# Altium PCB PCB2.PcbDoc
Units mm, origin at the board's own origin, x right, y up, seen from the top; angles counter-clockwise.
Board outline 58.67 x 100.33 mm, 2 copper layers (Top Layer, Bottom Layer); 70 components, 53 nets, 269 pads, 89 vias.
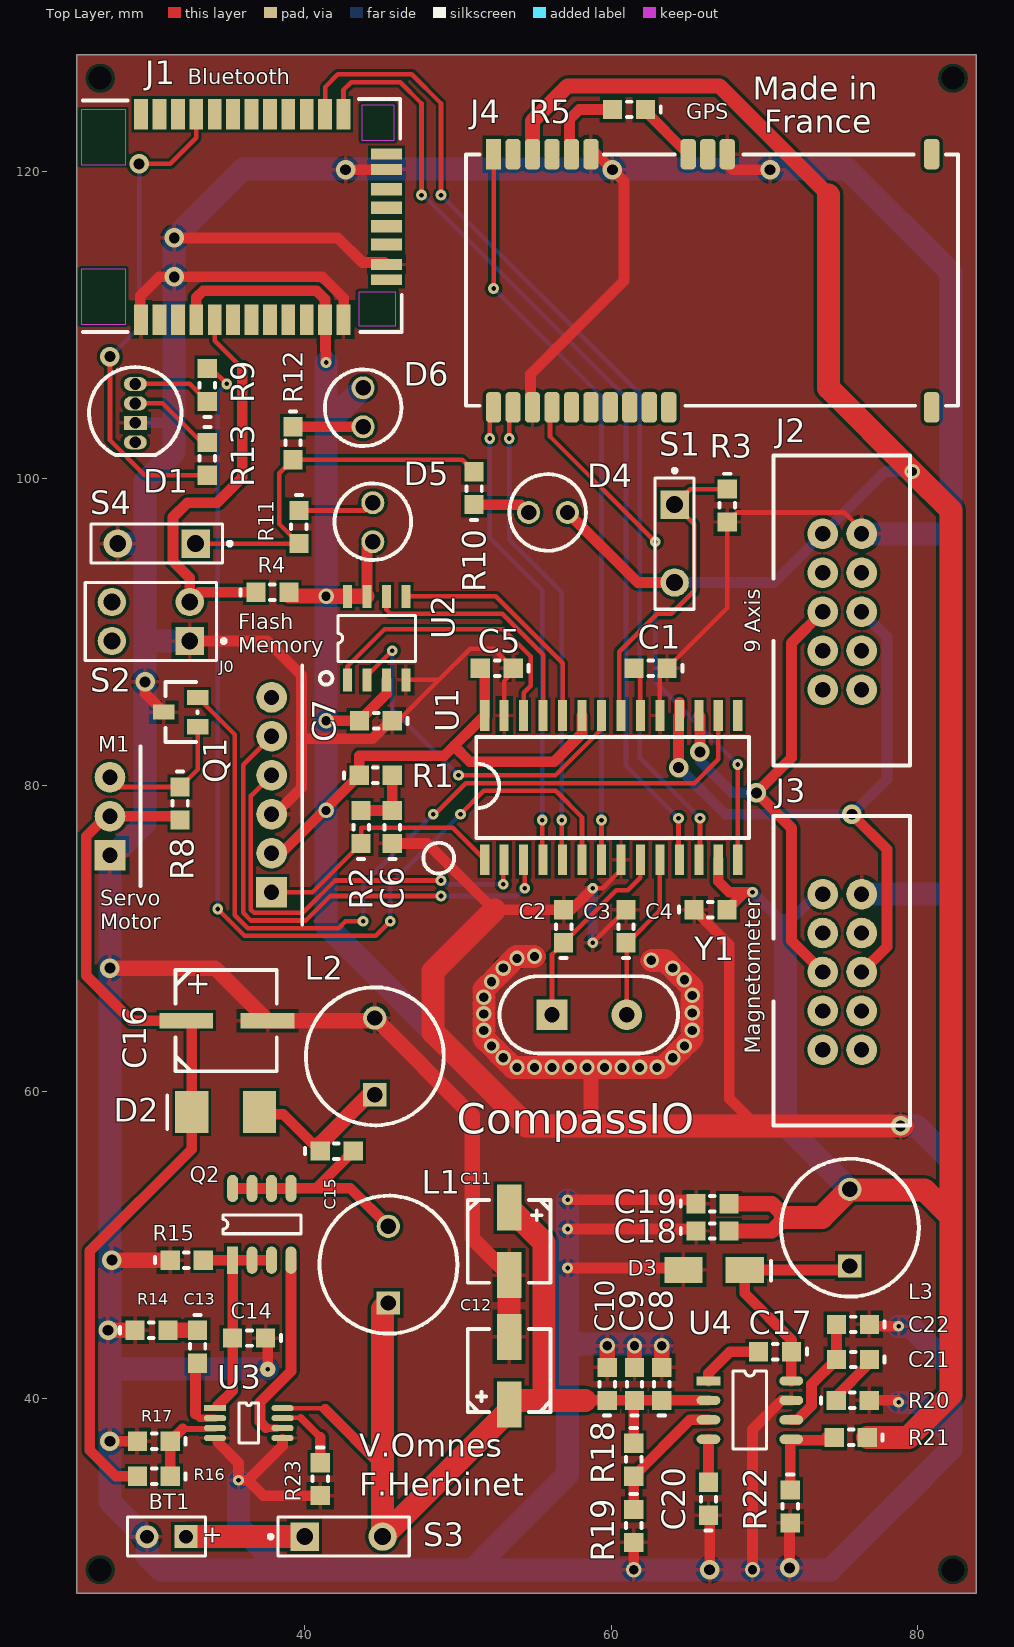
[diagram p0: Top Layer view]
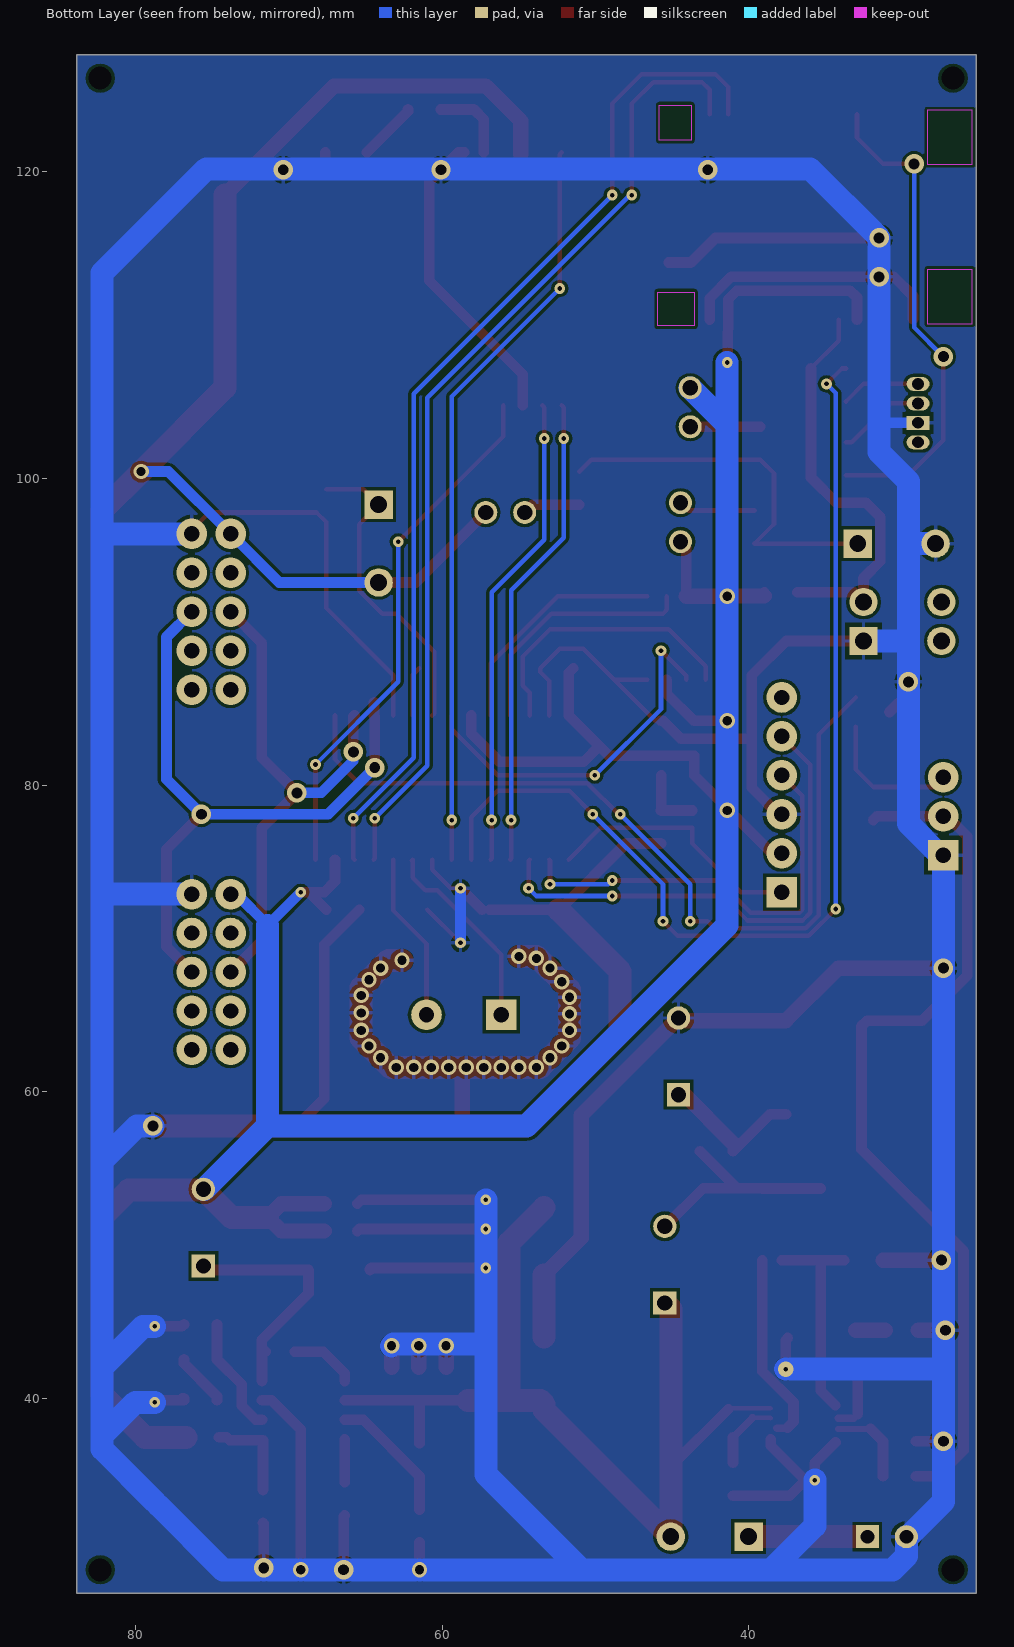
[diagram p1: Bottom Layer view, seen from below]

## Layer stack, top to bottom
Top Solder: solder mask 0.0102, Solder Resist, Dk 3.5
Top Layer: signal copper 0.0356
Dielectric 1: dielectric 0.32, FR-4, Dk 4.8
Bottom Layer: signal copper 0.0356
Bottom Solder: solder mask 0.0102, Solder Resist, Dk 3.5

## Board outline
25.146,27.305 83.82,27.305 83.82,127.635 25.146,127.635

## Design rules (kind name [scope] priority, off if disabled: settings)
Clearance [All] p1: gap=0.2
HoleSize [All] p1: absolutevalues=TRUE maxlimit=2.54 minlimit=0.3 maxpercent=80.000 minpercent=20.000
MinimumSolderMaskSliver [All] p1: minsoldermaskwidth=0
PolygonConnect [All] p1: connectstyle=Relief reliefconductorwidth=0.254 reliefentries=4 polygonreliefangle="90 Angle" airgapwidth=0.254
RoutingVias [All] p1: holewidth=0.711 width=1.27 viastyle="Through Hole" minholewidth=0.3 minwidth=0.2 maxholewidth=0.711 maxwidth=1.27
SilkToSilkClearance [All] p1: silktosilkclearance=0.1
SilkToSolderMaskClearance [IsPad] p1: minsilkscreentomaskgap=0.1 clearancetoexposedcopper=TRUE
SolderMaskExpansion [All] p1: expansion=0.102
UnpouredPolygon [All] p1: allowunpoured=FALSE
Width [All] p1: maxlimit=2 minlimit=0.2 preferedwidth=0.3
25 further rules are at their usual default settings.

## Classes and differential pairs
component class Accelerometer/Gyroscope/Magnetometer: J2 J3
component class Bluetooth: J1 R4 S2
component class Flash: C7 U2
component class GPS: J4 R5
component class "LED RGB": D1 D4 D5 D6 R9 R10 R11 R12 R13 S4
component class PIC32: C1 C2 C3 C4 C5 C6 J0 R1 R2 R3 S1 U1 Y1
component class POWER: BT1 C8 C9 C10 C11 C12 C13 C14 C15 C16 C17 C18 C19 C20 C21 C22 D2 D3 L2 Q2 R14 R15 R16 R17 R18 R19 R20 R21 R22 R23 S3 U3 U4
component class ServoMotor: M1 Q1 R8

## Components (designator, comment, footprint, x,y, rotation, side; value= is the part's Value field where it differs from the comment)
BT1 "6V" BAT-2 30.988,30.988 r180 top
C1 "10μF" own_0603 63.636,87.63 r180 top
C2 "15pF" own_0603 56.896,69.723 r90 top
C3 "15pF" own_0603 60.96,69.723 r90 top
C4 "0.1μF" own_0603 65.405,71.882 r0 top
C5 "0.1μF" own_0603 53.603,87.63 r180 top
C6 "0.1μF" own_0603 45.72,76.2 r90 top
C7 "100nF" own_0603 45.72,84.201 r180 top
C8 "4.7uF" own_0603 63.293,39.878 r90 top
C9 "4.7uF" own_0603 61.515,39.878 r90 top
C10 "0.01uF" own_0603 59.737,39.878 r90 top
C11 "Cin" WE-865080542005 53.34,52.451 r270 top
C12 "Cin" WE-865080542005 53.34,39.624 r90 top
C13 "0.1uF" own_0603 33.02,44.45 r270 top
C14 "1nF" own_0603 37.456,43.942 r180 top
C15 "1uF" own_0603 41.021,56.134 r0 top
C16 "Cout" SMT-HA-V-D 32.385,64.643 r90 top
C17 "0.1uF" own_0603 71.755,43.053 r180 top
C18 "47uF" own_0603 65.532,50.927 r0 top
C19 "47uF" own_0603 65.532,52.705 r0 top
C20 "0.015uF" own_0603 66.341,32.385 r90 top
C21 "1000pF" own_0603 76.835,42.545 r180 top
C22 "47pF" own_0603 76.835,44.831 r180 top
D1 "L-154A4SUREQBFZGEW" L-154A4SUREQBFZGEW 28.956,102.362 r180 top
D2 "MBRS130LT3" SMB-403A-03-J 32.639,58.674 r0 top
D3 "B240A" SMA-B2XX/A 68.707,48.387 r180 top
D4 "LED3" LED2.5 57.15,97.79 r180 top
D5 "LED3" LED2.5 44.45,95.885 r90 top
D6 "LED3" LED2.5 43.815,105.918 r270 top
J0 "Program / Debug" "C-Grid III X6" 37.846,73.025 r90 top
J1 "RN42" RN42 29.337,110.363 r90 top
J2 "MOD-MPU9150" "UEXT_MALE x10" 73.787,96.393 r0 top
J3 "MAG3110 Breakout" "UEXT_MALE x10" 73.787,72.898 r0 top
J4 "A2035-H" A2035-H 52.324,104.648 r90 top
L1 "10uH" "RLB Series" 45.466,46.228 r90 top
L2 "10uH" "RLB Series" 44.577,59.817 r90 top
L3 "10uH" "RLB Series" 75.565,48.641 r90 top
M1 "SG90" "C-Grid III x3" 27.305,75.438 r90 top
Q1 "MOSFET-2N7002" 2N7002 33.02,83.82 r90 top
Q2 "IRF7807" SO-8 35.306,49.022 r90 top
R1 "10k" own_0603 43.561,80.645 r0 top
R2 "1k" own_0603 43.688,76.2 r90 top
R3 "1k" own_0603 67.564,99.314 r270 top
R4 "10k" own_0603 36.83,92.583 r0 top
R5 "10K" own_0603 62.23,124.079 r180 top
R8 "5k" own_0603 31.877,79.883 r270 top
R9 "330" own_0603 33.655,105.029 r90 top
R10 "1K" own_0603 51.054,98.298 r90 top
R11 "1K" own_0603 39.624,97.917 r270 top
R12 "1K" own_0603 39.243,103.378 r270 top
R13 "330" own_0603 33.655,102.362 r270 top
R14 "4.7K" own_0603 28.947,44.45 r0 top
R15 "0.05" own_0603 31.242,49.022 r0 top
R16 "60K" own_0603 31.242,34.925 r180 top
R17 "20K" own_0603 31.242,37.211 r180 top
R18 "332K" own_0603 61.468,37.084 r270 top
R19 "68.1K" own_0603 61.468,32.766 r270 top
R20 "29.4K" own_0603 74.676,39.878 r0 top
R21 "10.2K" own_0603 76.699,37.465 r180 top
R22 "3.24K" own_0603 71.675,34.036 r270 top
R23 "40K" own_0603 41.021,35.814 r270 top
S1 "SW-PB" SPST-2 64.135,95.758 r270 top
S2 "Switch" DPST-4 29.972,90.678 r180 top
S3 "SW-SPST" SPST-2 42.545,30.988 r0 top
S4 "SW-SPST" SPST-2 30.353,95.758 r180 top
U1 "PIC32MX250F128B" PIC32MX250F128/SO 51.444,75.946 r0 top
U2 "LE25U40CMD" LE25U40CMDTWG 42.799,86.868 r90 top
U3 "LM3488" S-PDSO-G8 34.163,39.37 r0 top
U4 "TPS54231D" R-PDSO-G8 66.341,41.148 r0 top
Y1 "8MHz" 9B-8.000MAAJ-B 56.134,65.024 r0 top

## Footprints (in the part's own frame and the unit in brackets; to place one, negate y for a bottom-side part, rotate by r counter-clockwise, add the part's x,y. Pads: shape width x height; smd on the part's side, far side on the other; paste and mask are expansions set on the pad)
2N7002 [mm]
  rect 1x1.4 smd: 1(0,0) 2(1.9,0) 3(0.95,2.2)
  silkscreen extent -1,0 2.9,2.1
9B-8.000MAAJ-B [mm] "Quartz 8MHz"
  rect 2x2 hole 1: 1(0,0)
  round 2 hole 1: 2(4.88,0)
  silkscreen extent -3.41,-2.52 8.21,2.52
A2035-H [mm]
  rect 2x1 smd: 1(16.51,0)
  rrect50% 2x1 smd: 2(16.51,-1.27) 3(16.51,-2.54) 4(16.51,-3.81) 5(16.51,-5.08) 6(16.51,-6.35) 7(16.51,-12.7) 8(16.51,-13.97) 9(16.51,-15.24) 10(16.51,-28.575) 11(0,-28.575) 12(0,-11.43) 13(0,-10.16) 14(0,-8.89) 15(0,-7.62) 16(0,-6.35) 17(0,-5.08) 18(0,-3.81) 19(0,-2.54) 20(0,-1.27) 21(0,0)
  silkscreen extent 0.1,-30.3 16.5,1.8
BAT-2 [mm] "Battery; 2 Leads"
  rect 1.5x1.5 hole 0.9: 1(-1.27,0)
  round 1.5 hole 0.9: 2(1.27,0)
  silkscreen extent -2.54,-1.27 2.54,1.27
"C-Grid III x3" [mm]
  rect 2x2 hole 1: 1(0,0)
  round 2 hole 1: 2(2.54,0) 3(5.08,0)
  silkscreen extent -2,-2 7.1,-2
"C-Grid III X6" [mm]
  rect 2x2 hole 1: 1(0,0)
  round 2 hole 1: 2(2.54,0) 3(5.08,0) 4(7.62,0) 5(10.16,0) 6(12.7,0)
  silkscreen extent -2.1,-2 14.8,-2
DPST-4 [mm] "Switch; 4 Leads"
  rect 1.85x1.85 hole 1.1: 1(-2.54,1.27)
  round 1.85 hole 1.1: 2(-2.54,-1.27) 3(2.54,-1.27) 4(2.54,1.27)
  silkscreen extent -4.88,-2.54 4.28,2.54
L-154A4SUREQBFZGEW [mm] "LED RGB"
  oval 1.5x0.9 hole 0.762: 1(0,0) 3(0,-2.54) 4(0,-3.81)
  rect 1.5x0.9 hole 0.762: 2(0,-1.27)
  silkscreen extent -3.01,-4.91 3.01,0.82
LE25U40CMDTWG [mm]
  rect 1.5x0.6 smd: 1(0,0) 2(0,-1.27) 3(0,-2.54) 4(0,-3.81) 5(5.45,-3.81) 6(5.45,-2.54) 7(5.45,-1.27) 8(5.45,0)
  silkscreen extent -0.31,-4.44 4.2,1.81
LED2.5 [mm] "LED"
  round 1.5 hole 1: 1(0,0) 2(2.54,0)
  silkscreen extent -1.2,-2.5 3.8,2.5
own_0603 [mm] "0603_fp"
  rect 1.25x1.25 smd: 1(0,0) 2(2.15,0)
  silkscreen extent -1,-0.5 1.2,0.5
PIC32MX250F128/SO [mm]
  rect 0.6x2 smd: 1(0.3,-0.8) 2(1.57,-0.8) 3(2.84,-0.8) 4(4.11,-0.8) 5(5.38,-0.8) 6(6.65,-0.8) 7(7.92,-0.8) 8(9.19,-0.8) 9(10.46,-0.8) 10(11.73,-0.8) 11(13,-0.8) 12(14.27,-0.8) 13(15.54,-0.8) 14(16.81,-0.8) 15(16.81,8.6) 16(15.54,8.6) 17(14.27,8.6) 18(13,8.6) 19(11.73,8.6) 20(10.46,8.6) 21(9.19,8.6) 22(7.92,8.6) 23(6.65,8.6) 24(5.38,8.6) 25(4.11,8.6) 26(2.84,8.6) 27(1.57,8.6) 28(0.3,8.6)
  silkscreen extent -3.7,-1.7 17.55,7.2
R-PDSO-G8 [mm] "TPS54231"
  rect 1.55x0.6 smd: 1(0,0)
  oval 1.55x0.6 smd: 2(0,-1.27) 3(0,-2.54) 4(0,-3.81) 5(5.4,-3.81) 6(5.4,-2.54) 7(5.4,-1.27) 8(5.4,0)
  silkscreen extent 1.61,-4.44 3.79,0.64
"RLB Series" [mil]
  rect 60x60 hole 39.37: 1(0,0)
  round 60 hole 39.37: 2(196.85,0)
  silkscreen extent -79,-177 276,177
RN42 [mm]
  rect 2x0.9 smd: 1(0,0) 2(0,-1.2) 3(0,-2.4) 4(0,-3.6) 5(0,-4.8) 6(0,-6) 7(0,-7.2) 8(0,-8.4) 9(0,-9.6) 10(0,-10.8) 11(0,-12) 12(0,-13.2) 13(13.4,-13.2) 14(13.4,-12) 15(13.4,-10.8) 16(13.4,-9.6) 17(13.4,-8.4) 18(13.4,-7.2) 19(13.4,-6) 20(13.4,-4.8) 21(13.4,-3.6) 22(13.4,-2.4) 23(13.4,-1.2) 24(13.4,0)
  rect 0.7x2 smd: 28(9.8,-16) 29(3.6,-16) 30(10.8,-16) 35(2.6,-16)
  rect 0.8x2 smd: 31(8.5,-16) 32(7.3,-16) 33(6.1,-16) 34(4.9,-16)
  Keep-Out Layer region: 10.1,1 13.7,1 13.7,3.9 10.1,3.9
  Keep-Out Layer region: -0.3,1 3.3,1 3.3,3.9 -0.3,3.9
  Keep-Out Layer region: 11.7,-16.5 14,-16.5 14,-14.4 11.7,-14.4
  Keep-Out Layer region: -0.4,-16.6 1.8,-16.6 1.8,-14.2 -0.4,-14.2
  silkscreen extent -0.8,-17 14.4,3.8
S-PDSO-G8 [mm] "LM3488"
  rect 1.45x0.4 smd: 1(0,0)
  oval 1.45x0.4 smd: 2(0,-0.65) 3(0,-1.3) 4(0,-1.95) 5(4.4,-1.95) 6(4.4,-1.3) 7(4.4,-0.65) 8(4.4,0)
  silkscreen extent 1.56,-2.28 2.84,0.33
SMA-B2XX/A [mm] "B240A-13-F"
  rect 2.5x1.7 smd: 1(0,0) 2(4,0)
  silkscreen extent -1.7,-0.6 -1.7,0.7
SMB-403A-03-J [mil] "MBRS130LT3G"
  rect 85x107.99 smd: 1(0,0) 2(174.02,0)
  silkscreen extent -63,-43 -63,43
SMT-HA-V-D [mm] "EEEHA1A101WP"
  rect 1x3.5 smd: 1(0,0.1) 2(0,-5.2)
  silkscreen extent -3.3,-5.8 3.3,0.8
SO-8 [mm] "IRF7807"
  rect 1.78x0.72 smd: 1(0,0)
  oval 1.78x0.72 smd: 2(0,-1.27) 3(0,-2.54) 4(0,-3.81) 5(4.68,-3.81) 6(4.68,-2.54) 7(4.68,-1.27) 8(4.68,0)
  silkscreen extent 1.72,-4.44 2.96,0.64
SPST-2 [mm] "Switch; 2 Leads"
  rect 1.85x1.85 hole 1.1: 1(-2.54,0)
  round 1.85 hole 1.1: 2(2.54,0)
  silkscreen extent -4.89,-1.27 4.28,1.27
"UEXT_MALE x10" [mm]
  round 2 hole 1: 1(0,0) 2(2.54,0) 3(0,-2.54) 4(2.54,-2.54) 5(0,-5.08) 6(2.54,-5.08) 7(0,-7.62) 8(2.54,-7.62) 9(0,-10.16) 10(2.54,-10.16)
  silkscreen extent -3.2,-15.1 5.7,5.1
WE-865080542005 [mm]
  rect 3x1.6 smd: 1(0,0) 2(4.4,0)
  silkscreen extent -0.5,-2.7 4.9,2.7

## Part data
BT1: library part Battery, "4xAA"
C1 C2 C3 C4 C5 C6 C7 C8 C9 C10 C13 C14 C15 C17 C18 C19 C20 C21 C22: library part Cap, "Capacitor"
C11 C12 C16: library part "Cap Pol1", "Polarized Capacitor (Radial)"
D1: "LED RGB"
D2 D3: library part "Diode 10TQ035", "Schottky Rectifier"
D4 D5 D6: "Typical BLUE SiC LED"
J0: library part ICSP
J1: "Bluetooth Module"
J2: "9-Axis"
J3: library part MOD-MAG3110
J4: "GPS Module"
L1 L2 L3: library part Inductor, "Inductor"
M1: "Servo motor"
Q1: library part MOSFET-N, "N-Channel MOSFET"
Q2: "MOSFET-8"
R1 R2 R3 R4 R5 R8 R9 R10 R11 R12 R13 R14 R15 R16 R17 R18 R19 R20 R21 R22 R23: library part Res1, "Resistor"
S1: "Switch"
S2: library part SW-PB, "Reset"
S3 S4: "Single-Pole, Single-Throw Switch"
U1: "Microcontrolleur"
U2: "Flash memory"
U3: "SEPIC 5V"
U4: "Buck SD 3.3V"
Y1: library part XTAL, "Crystal Oscillator"

## Free pads (board coordinates)
  round 0 hole 1.5: ""(26.67,28.829) ""(26.67,126.111) ""(82.296,28.829) ""(82.296,126.111)

## Via types
v1: diameter 1, hole 0.6, Top Layer to Bottom Layer, 35 vias
v2: diameter 0.7, hole 0.3, Top Layer to Bottom Layer, 34 vias
v3: diameter 1.27, hole 0.711, Top Layer to Bottom Layer, 19 vias
v4: diameter 1, hole 0.3, Top Layer to Bottom Layer, 1 vias

## Nets (pads, with @x,y where several pads share a name; then routed paths per layer and width w, separated by ;. In a path a pad name is that pad's centre, name@x,y a point inside that pad or via, vN(x,y) a via of type N, cw(c..) or ccw(c..) an arc to the next point about the centre after c; other vN are vias at no path point)
FEEDBCK: R16.1 R17.1 U3.3 | length 5.5
  Top Layer w0.4: 32.051,38.02 U3.3@34.163,38.02
  Top Layer w0.7: R16.1 R17.1 32.051,38.02
GND: BT1.2 C1.1 C2.2 C3.2 C4.1 C5.1 C6.1 C7.1 C8.2 C9.2 C10.2 C11.2 C12.2 C14.1 C16.2 C18.1 C19.1 C20.1 C22.1 D1.2 D3.2 J0.3 J1.1 J1.12 J1.28 J1.29 J2.2 J3.2 J4.6 J4.9 J4.19 L2.2 M1.1 Q1.3 R3.2 R14.1 R15.1 R17.2 R19.2 R20.2 R22.2 R23.2 S2.1 S4.2 U1.8 U1.19 U1.27 U2.4 U3.4 U3.5 U4.7 | length 722
  Top Layer w0.3: C7.1@46.101,84.201 48.768,86.868 ; U2.4 48.768,86.868 ; 52.333,71.873 52.397,71.873 ; U1.27 53.014,86.796 53.603,87.385 C5.1 52.333,88.9 50.8,88.9 48.768,86.868 ; C2.2 C2.2@57.395,71.873 ; v2(58.801,69.723) C3.2@60.955,71.877 ; v2(58.801,73.279) 59.436,73.279 60.634,74.477 U1.8 ; U1.19 63.174,87.168 C1.1 67.564,91.558 R3.2 68.19,97.79 75.184,97.79 J2.2@76.327,96.647
  Top Layer w0.7: v3(27.305,37.211) R17.2 ; J1.1@29.287,110.413 29.287,111.907 30.537,113.157 v3(31.496,113.157) 41.148,113.157 42.545,111.76 J1.12@42.545,110.363 ; v3(29.591,86.741) 29.591,85.999 Q1.3 ; v3(31.496,115.697) 42.159,115.697 43.768,114.088 J1.29@45.212,114.088 ; S2.1 37.555,89.408 39.796,87.167 39.796,83.058 ; 34.344,37.138 35.687,35.796 v2(35.687,34.671) 36.314,34.671 ; C14.1 37.592,43.806 v4(37.592,41.91) ; J0.3@37.955,77.996 39.796,79.837 39.796,83.058 ; U3.5@38.563,37.32 38.563,36.92 36.314,34.671 ; R23.2 37.321,33.664 36.314,34.671 ; v3(42.672,120.142) 42.672,120.257 42.787,120.142 J1.28@45.316,120.142 ; C6.1 48.006,76.2 52.333,71.873 ; C7.1 45.598,84.201 44.423,83.026 39.828,83.026 39.796,83.058 ; 52.397,71.873 C2.2 ; J4.19@54.737,104.775 54.737,106.807 60.833,112.903 60.833,119.38 v3(60.071,120.142) 58.928,121.285 J4.6@58.547,121.285 ; v2(57.15,48.514) D3.2@64.643,48.514 ; v2(57.15,51.054) 65.405,51.054 C18.1 ; v2(57.15,52.959) 65.278,52.959 C19.1 ; C2.2@57.395,71.873 v2(58.801,73.279) ; v1(61.468,28.829) R19.2 ; D3.2 D3.2@64.707,48.45 ; C4.1 67.691,69.596 67.691,59.563 69.469,57.785 ; C20.1 66.421,32.305 v3(66.421,28.829) ; J4.9@67.617,121.285 67.617,120.47 67.945,120.142 v3(70.358,120.142) ; v1(69.215,28.829) 69.215,37.973 71.12,39.878 U4.7 ; v3(71.628,28.956) 71.628,31.839 R22.2 ; R20.2@76.826,40.005 76.953,40.005 R20.2 78.613,39.878 v2(78.74,39.751) ; C22.1 76.962,44.704 v2(78.74,44.704)
  Top Layer w1: v3(27.178,44.45) R14.1 ; v3(27.305,68.072) 34.156,68.072 C16.2 L2.2@44.577,64.643 ; v3(27.432,49.022) R15.1 ; L2.2 50.927,58.467 50.927,50.464 C11.2 ; 58.674,57.658 v1@58.674,61.595 ; C10.2 v1(59.737,43.434) ; C9.2 v1(61.515,43.434) ; C8.2 v1(63.293,43.434)
  Top Layer w1.5: 52.397,71.873 48.387,67.863 48.387,63.881 54.483,57.785 69.469,57.785 v3(78.867,57.785) v3@78.994,57.785 ; C12.2 C11.2 ; v1(54.991,68.834) 53.848,68.834 51.689,66.675 v1(51.689,66.167) v1(51.689,65.087) v1(51.689,64.008) 51.689,63.5 v1(52.197,62.992) v1(52.959,62.23) 53.594,61.595 v1(53.848,61.595) v1(54.991,61.595) v1(56.134,61.595) v1(57.277,61.595) v1(59.563,61.595) v1(60.706,61.595) v1(61.849,61.595) v1(62.992,61.595) 63.373,61.595 65.278,63.5 65.278,66.802 63.5,68.58 v1(62.611,68.58) ; J2.2 J2.2@76.327,96.647
  Bottom Layer w0.7: D1.2 31.369,103.632 ; v2(58.801,69.723) v2(58.801,73.279) ; v3(60.071,120.142) 60.77,120.142
  Bottom Layer w1.5: S4.2 29.591,95.758 ; BT1.2@29.591,30.988 27.305,33.274 v3(27.305,37.211) 27.305,41.91 ; BT1.2 29.718,29.718 30.607,28.829 38.544,28.829 ; S2.1 29.591,89.408 ; v2(35.687,34.671) 35.687,31.686 38.544,28.829 ; v4(37.592,41.91) 27.305,41.91 ; 57.15,37.338 57.15,35.052 ; v2(57.15,52.959) v2(57.15,51.054) v2(57.15,48.514) 57.15,43.561 ; v1(63.293,43.434) 63.166,43.561 57.15,43.561 ; J3.2 82.169,72.898 ; J2.2 82.042,96.393 ; 78.486,33.02 74.295,28.829 v1(69.215,28.829) v3(66.421,28.829) v1(61.468,28.829) 50.927,28.829 ; 78.74,33.274 82.169,36.703 82.169,37.592 ; v2(78.74,39.751) 80.01,39.751 82.169,37.592 ; v2(78.74,44.704) 79.502,44.704 82.169,42.037 ; v3(78.867,57.785) 79.883,57.785 82.169,55.499 ; 27.305,41.91 v3(27.305,68.072) M1.1 27.523,75.438 29.591,77.506 v3(29.591,86.741) 29.591,89.408 ; 29.591,89.408 29.591,95.758 ; 29.591,95.758 29.591,99.822 31.496,101.727 v3(31.496,113.157) v3(31.496,115.697) 36.005,120.206 75.374,120.206 82.169,113.411 82.169,72.898 ; 38.544,28.829 50.927,28.829 ; 50.927,28.829 57.15,35.052 ; 57.15,35.052 57.15,43.561 ; 82.169,37.592 82.169,42.037 ; 82.169,42.037 82.169,55.499 ; 82.169,55.499 82.169,72.898
  other v1: 58.42,61.595 64.008,62.23 64.77,62.992 65.278,64.008 65.278,65.151 65.278,66.294 52.197,67.183 64.77,67.31 52.959,68.072 64.008,68.072 53.848,68.707
"MAIN BUTTON": R3.1 S1.1 U1.21 | length 20.7
  Top Layer w0.3: U1.21 60.511,84.669 60.511,88.705 62.992,91.186 63.906,91.186 65.41,92.69 65.41,97.023 S1.1 65.151,99.314 R3.1
MCLR: J0.1 R2.1 U1.1 | length 17.1
  Top Layer w0.3: J0.1 40.513,73.025 R2.1 43.688,77.216 49.674,77.216 U1.1
NetBT1_1: BT1.1 S3.1 | length 7.9
  Top Layer w1.5: BT1.1 S3.1@40.132,30.988
NetC1_2: C1.2 U1.20 | length 3.3
  Top Layer w0.3: C1.2 61.904,87.212 U1.20
NetC6_2: C6.2 R1.2 R2.2 | length 4.3
  Top Layer w0.7: R2.2 C6.2 45.711,78.359 R1.2
NetC8_1: C8.1 C9.1 C10.1 C11.1 C12.1 L1.1 R18.1 S3.2 U3.8 U4.2 | length 64.9
  Top Layer w0.3: U3.8 41.275,39.37 41.338,39.306
  Top Layer w0.7: 41.338,39.306 45.085,35.56 ; 58.293,39.878 C10.1 C9.1 C8.1 U4.2 ; R18.1 C9.1@61.468,39.831
  Top Layer w1.5: L1.1 45.085,45.847 45.085,35.56 S3.2 53.34,39.243 C12.1 53.594,39.878 55.626,39.878 ; C11.1 55.626,50.165 55.626,39.878 ; 58.293,39.878 55.626,39.878
NetC13_1: C13.1 R14.2 | length 1.9
  Top Layer w1: R14.2 C13.1
NetC13_2: C13.2 U3.2 | length 4.8
  Top Layer w0.3: 32.888,38.989 32.893,38.989
  Top Layer w0.5: 32.893,38.989 33.162,38.72 U3.2
  Top Layer w0.7: 32.888,38.989 32.888,42.168 C13.2
NetC14_2: C14.2 Q2.1 Q2.2 Q2.3 R15.2 U3.1 | length 13.9
  Top Layer w0.7: R15.2@33.773,49.022 Q2.1 ; U3.1@34.353,39.56 35.306,40.513 C14.2 Q2.1 ; Q2.3 Q2.2 Q2.1
NetC15_1: C15.1 D2.2 L2.1 | length 9.8
  Top Layer w0.7: D2.2@37.567,58.547 38.608,58.547 C15.1 C15.1@41.021,56.642
  Top Layer w1: C15.1@41.021,56.642 44.259,59.88 L2.1@44.514,59.88
NetC15_2: C15.2 L1.2 Q2.5 Q2.6 Q2.7 Q2.8 | length 14.6
  Top Layer w0.3: Q2.5 Q2.5@39.135,53.721
  Top Layer w0.7: Q2.8 Q2.7 Q2.6 Q2.5 ; Q2.5@39.135,53.721 40.767,53.721 ; C15.2 43.171,56.125 40.767,53.721 ; L1.2 42.973,53.721 40.767,53.721
NetC17_1: C17.1 D3.1 L3.1 U4.8 | length 15.7
  Top Layer w0.7: C17.1@71.501,43.053 C17.1@71.691,43.243 ; U4.8 C17.1@71.741,43.053 ; C17.1 71.755,43.815 68.707,46.863 D3.1 75.311,48.387 L3.1
NetC17_2: C17.2 U4.1 | length 4.3
  Top Layer w0.7: U4.1 66.341,41.652 67.742,43.053 C17.2
NetC20_2: C20.2 U4.4 | length 2.8
  Top Layer w0.7: C20.2 U4.4
NetC21_1: C21.1 R20.1 | length 3.6
  Top Layer w0.7: R20.1 74.676,40.132 76.835,42.291 C21.1
NetC21_2: C21.2 C22.2 U4.6 | length 7.7
  Top Layer w0.7: U4.6 72.148,38.608 73.066,39.526 73.066,40.926 C21.2 C22.2
NetD1_3: D1.3 R13.1 | length 5.8
  Top Layer w0.3: D1.3 30.734,104.902 33.274,102.362 R13.1
NetD1_4: D1.4 R9.1 | length 5.2
  Top Layer w0.3: D1.4 32.512,106.172 R9.1
NetD4_2: D4.2 R10.1 | length 3.8
  Top Layer w0.7: R10.1 54.102,98.298 D4.2
NetD5_2: D5.2 R11.1 | length 5
  Top Layer w0.3: R11.1 43.942,97.917 D5.2
NetD6_2: D6.2 R12.1 | length 4.6
  Top Layer w0.7: R12.1 D6.2
NetJ1_5: J1.5 R4.1 S2.2 | length 27.2
  Top Layer w0.3: J1.5 34.137,108.992 35.941,107.188
  Top Layer w0.7: 35.941,107.188 35.941,100.076 34.29,98.425 32.356,98.425 31.418,97.487 31.418,94.605 32.512,93.511 S2.2 33.147,92.583 R4.1
NetJ1_13: J1.13 U1.11 | length 63.8
  Top Layer w0.3: J1.13 42.537,125.349 43.045,125.857 46.228,125.857 47.625,124.46 v2(47.625,118.491) ; v2(64.389,77.851) 64.389,75.201 U1.11
  Bottom Layer w0.3: v2(47.625,118.491) 47.752,118.491 60.96,105.283 60.96,81.28 v2(64.389,77.851)
NetJ1_14: J1.14 U1.12 | length 66.8
  Top Layer w0.3: J1.14 41.337,125.538 42.164,126.365 46.99,126.365 48.895,124.46 v2(48.895,118.491) ; U1.12 65.786,75.218 v2(65.786,77.851)
  Bottom Layer w0.3: v2(48.895,118.491) 61.849,105.537 61.849,81.788 v2(65.786,77.851)
NetJ1_21: J1.21 R13.2 | length 32.1
  Top Layer w0.3: v3(27.305,107.95) 27.305,102.489 29.582,100.212 R13.2 ; v3(29.21,120.523) 31.242,120.523 32.937,122.218 J1.21
  Bottom Layer w0.3: v3(27.305,107.95) 29.21,109.855 v3(29.21,120.523)
NetJ2_5: J2.5 J3.5 U1.17 | length 34.6
  Top Layer w0.7: U1.17 65.786,84.474 v3(65.786,82.169) ; J3.5 71.755,69.85 71.755,77.216 v3(69.469,79.502) 71.755,81.788 71.755,89.281 J2.5
  Bottom Layer w0.7: v3(65.786,82.169) 65.786,81.589 67.873,79.502 v3(69.469,79.502)
NetJ2_6: J2.6 J3.6 U1.18 | length 43.3
  Top Layer w0.7: v3(64.389,81.153) 64.389,84.491 U1.18 U1.18@64.444,85.399 ; v3(75.692,78.105) 77.978,75.819 77.978,69.469 J3.6
  Bottom Layer w0.7: v3(64.389,81.153) 67.437,78.105 v3@75.438,78.105 ; v3(75.692,78.105) 77.978,80.391 77.978,89.662 J2.6
NetJ4_1: J4.1 U1.7 | length 49.1
  Top Layer w0.3: J4.1@52.197,121.285 J4.1 v2(52.324,112.395) ; U1.7 v2(59.364,77.724)
  Bottom Layer w0.3: v2(52.324,112.395) 59.364,105.355 v2(59.364,77.724)
NetJ4_5: J4.5 R5.2 | length 5.2
  Top Layer w0.7: J4.5@57.277,121.285 57.277,123.444 57.912,124.079 R5.2
NetJ4_7: J4.7 R5.1 | length 3.9
  Top Layer w0.7: R5.1 62.23,123.952 J4.7@64.897,121.285
NetJ4_18: J4.18 U1.14 | length 34.8
  Top Layer w0.3: J4.18@56.007,104.775 56.007,102.743 v2(62.865,95.885) ; v2@68.199,81.407 v2(68.254,81.352) U1.14
  Bottom Layer w0.3: v2(62.865,95.885) 62.865,93.756 62.86,93.751 62.86,86.746 v2(68.254,81.352)
NetJ4_20: J4.20 U1.5 | length 31.1
  Top Layer w0.3: v2(53.34,102.616) 53.34,104.648 J4.20@53.467,104.775 ; v2(56.769,77.724) 56.769,75.201 U1.5
  Bottom Layer w0.3: v2(53.34,102.616) 53.34,96.012 56.769,92.583 v2(56.769,77.724)
NetJ4_21: J4.21 U1.4 | length 31.1
  Top Layer w0.3: v2(52.07,102.616) 52.07,104.648 J4.21@52.197,104.775 ; v2(55.499,77.724) 55.499,75.201 U1.4
  Bottom Layer w0.3: v2(52.07,102.616) 52.07,96.139 55.499,92.71 v2(55.499,77.724)
NetM1_3: M1.3 Q1.1 R8.1 | length 9.2
  Top Layer w0.3: M1.3 27.94,79.883 R8.1 33.02,81.026 Q1.1
NetQ1_2: Q1.2 U1.16 | length 55.9
  Top Layer w0.3: Q1.2 35.433,83.307 35.433,71.529 36.287,70.675 42.219,70.675 42.664,71.12 v2(43.815,71.12) ; v2(48.387,78.105) 48.488,78.105 50.52,80.137 65.43,80.137 66.984,81.691 U1.16
  Bottom Layer w0.3: v2(43.815,71.12) 43.815,73.533 v2(48.387,78.105)
NetQ2_4: Q2.4 U3.6 | length 12.7
  Top Layer w0.5: 37.465,38.1 37.495,38.07 U3.6@38.182,38.07
  Top Layer w0.7: 37.465,38.1 37.084,38.481 37.084,39.751 39.116,41.783 Q2.4
NetR9_2: R9.2 U1.6 | length 69.5
  Top Layer w0.3: R9.2 33.918,107.179 v2(34.925,106.172) ; v2(34.331,71.923) 36.08,70.175 44.648,70.175 v2(45.593,71.12) ; v2(50.165,78.105) 51.689,79.629 56.388,79.629 58.094,77.923 U1.6
  Bottom Layer w0.3: v2(34.331,71.923) 34.331,105.578 v2(34.925,106.172) ; v2(45.593,71.12) 45.593,73.533 v2(50.165,78.105)
NetR10_2: R10.2 R11.2 R12.2 S4.1 | length 25.2
  Top Layer w0.3: S4.1 39.615,95.758 R11.2 38.354,97.037 38.354,100.339 R12.2 50.274,101.228 R10.2
NetR18_2: R18.2 R19.1 U4.3 | length 8.6
  Top Layer w0.7: R19.1 R18.2 65.142,38.608 U4.3
NetR21_2: R21.2 R22.1 U4.5 | length 6.2
  Top Layer w0.7: R22.1 71.675,37.272 73.848,37.272 74.041,37.465 R21.2
NetR23_1: R23.1 U3.7 | length 4.6
  Top Layer w0.3: U3.7 38.578,38.735 39.751,38.735
  Top Layer w0.5: 39.751,38.735 41.021,37.465
  Top Layer w0.7: R23.1 41.021,37.465
NetU1_22: U1.22 U2.2 | length 24
  Top Layer w0.3: U2.2 44.069,87.143 45.699,88.773 v2(45.72,88.773) ; v2(50.038,80.645) 56.362,80.645 59.364,83.647 U1.22
  Bottom Layer w0.3: v2(45.72,88.773) 45.72,84.963 v2(50.038,80.645)
NetU1_24: U1.24 U2.5 | length 15.4
  Top Layer w0.3: U2.5 52.462,92.318 56.824,87.956 U1.24
NetU1_25: U1.25 U2.6 | length 16.3
  Top Layer w0.3: U2.6 45.339,91.44 45.593,91.186 52.887,91.186 55.554,88.519 U1.25
NetU1_26: U1.26 U2.1 | length 18.6
  Top Layer w0.3: U2.1 42.799,87.757 45.212,90.17 52.959,90.17 54.737,88.392 54.737,86.487 54.284,86.034 U1.26
OSC1: C2.1 U1.9 Y1.1 | length 13.1
  Top Layer w0.3: Y1.1 56.134,68.961 C2.1 60.325,73.152 61.087,73.152 61.904,73.969 U1.9 U1.9@61.976,75.074
OSC2: C3.1 U1.10 Y1.2 | length 11
  Top Layer w0.3: Y1.2 61.014,69.669 63.174,71.829 U1.10
PGEC: J0.5 U1.3 | length 33.6
  Top Layer w0.3: J0.5 35.996,81.335 35.996,71.673 36.494,71.175 40.077,71.175 41.673,72.771 v2(48.895,72.771) ; U1.3 54.356,75.074 v2(54.356,73.279)
  Bottom Layer w0.3: v2(48.895,72.771) 53.848,72.771 v2(54.356,73.279)
PGED: J0.4 U1.2 | length 28.5
  Top Layer w0.3: J0.4 36.512,79.311 36.496,79.328 36.496,71.88 36.701,71.675 39.87,71.675 41.982,73.787 v2(48.895,73.787) ; v2(52.959,73.533) 52.959,75.091 U1.2
  Bottom Layer w0.3: v2(48.895,73.787) 49.149,73.533 v2(52.959,73.533)
V3P3: C4.2 C5.2 C7.2 C18.2 C19.2 D4.1 D5.1 D6.1 J0.2 J1.4 J1.11 J2.1 J3.1 J4.3 L3.2 R1.1 R4.2 R21.1 S1.2 U1.13 U1.23 U1.28 U2.3 U2.7 U2.8 | length 328.9
  Top Layer w0.7: J1.4 32.937,111.804 33.39,112.257 40.775,112.257 41.337,111.695 J1.11 v2(41.402,107.569) ; J0.2 38.481,75.565 R1.1 43.561,81.915 49.113,81.915 U1.28 51.744,87.339 C5.2 ; R4.2@38.98,92.338 R4.2 ; v1@41.393,92.338 v1(41.402,92.329) v1@41.413,92.318 ; v1(41.402,84.201) C7.2 45.339,85.97 U2.3 ; U2.7 44.069,95.504 D5.1 ; 49.748,82.55 50.764,81.534 56.261,81.534 58.094,83.367 U1.23 ; D4.1 61.722,93.218 S1.2 ; U1.13 66.984,73.732 67.691,73.025 68.698,73.025 ; C4.2 68.698,73.025 ; v2(69.215,73.025) 68.698,73.025
  Top Layer w1: R4.2@38.98,92.338 v1@41.393,92.338 ; v1@41.413,92.318 U2.8 U2.7 ; J4.3 54.864,123.317 57.15,125.603 67.056,125.603 74.168,118.491 ; C18.2 70.485,50.927 71.374,51.816 70.485,52.705 C19.2
  Top Layer w1.5: 71.374,51.816 73.74,51.816 L3.2 ; 74.168,118.491 74.168,105.918 v1(79.629,100.457) 82.169,97.917 82.169,51.863 ; L3.2@75.565,53.594 80.438,53.594 82.169,51.863 ; R21.1 79.375,37.465 82.169,40.259 82.169,51.863
  Bottom Layer w0.7: S1.2 70.612,93.218 J2.1 77.851,100.457 v1(79.629,100.457) ; v2(69.215,73.025) 71.374,70.866 73.406,72.898 J3.1
  Bottom Layer w1.5: v2(41.402,107.569) 41.402,103.505 ; D6.1 41.402,103.505 ; 71.374,70.866 71.374,57.785 ; L3.2@75.518,53.641 71.374,57.785 ; 41.402,103.505 v1(41.402,92.329) v1(41.402,84.201) v1(41.402,78.359) 41.402,70.866 54.483,57.785 71.374,57.785
V5: C16.1 D2.1 M1.2 R8.2 R16.2 | length 58.3
  Top Layer w0.7: R16.2 27.686,34.925 25.993,36.618 25.993,49.615 32.639,56.261 32.639,64.289 C16.1 28.702,64.643 25.755,67.59 25.755,76.666 27.067,77.978 M1.2 31.632,77.978 R8.2
pads on no net: D1.1 J0.6 J1.2 J1.3 J1.6 J1.7 J1.8 J1.9 J1.10 J1.15 J1.16 J1.17 J1.18 J1.19 J1.20 J1.22 J1.23 J1.24 J1.30 J1.31 J1.32 J1.33 J1.34 J1.35 J2.3 J2.4 J2.7 J2.8 J2.9 J2.10 J3.3 J3.4 J3.7 J3.8 J3.9 J3.10 J4.2 J4.4 J4.8 J4.10 J4.11 J4.12 J4.13 J4.14 J4.15 J4.16 J4.17 S2.3 S2.4 U1.15

## Polygon pours and split planes (outlines as drawn)
GND on Bottom Layer "GND PLAN" (solid, pour order 4): 25.146,127.635 83.82,127.635 83.82,27.305 25.146,27.305 25.146,127.635
GND on Top Layer "GND PLAN" (solid, pour order 6): 25.146,127.635 83.82,127.635 83.82,27.305 25.146,27.305 25.146,127.635

## Silkscreen, mask and mechanical layers (free items; w line width, h text height)
Top Overlay:
  text "Bluetooth" at 32.385,125.73 h1
  text "Made in" at 69.215,124.714 h1.5
  text "GPS" at 64.897,123.444 h1
  text "France" at 69.977,122.555 h1.5
  text "Flash" at 35.687,90.17 h1
  text "Memory" at 35.687,88.646 h1
  text "9 Axis" at 69.723,88.646 h1 r90
  text "Servo" at 26.67,72.136 h1
  text "Motor" at 26.67,70.612 h1
  text "Magnetometer" at 69.723,62.484 h1 r90
  text "CompassIO" at 49.911,57.277 h2
  text "V.Omnes" at 43.561,36.195 h1.5
  text "F.Herbinet" at 43.561,33.655 h1.5
Mechanical 1:
  lines w0.254: 25.146,27.305 83.82,27.305 83.82,127.635 25.146,127.635 25.146,27.305
  lines w0.5: 25.146,27.305 83.82,27.305 ; 25.146,27.305 25.146,127.635 ; 25.146,27.305 83.82,27.305 ; 25.146,27.305 25.146,127.635 ; 25.146,127.635 83.82,127.635 ; 25.146,127.635 83.82,127.635 ; 83.82,27.305 83.82,127.635 ; 83.82,27.305 83.82,127.635
Mechanical 3:
  lines w0.254: 19.406,28.852 19.914,27.328 ; 19.406,126.134 19.914,127.658 ; 19.66,27.328 20.168,27.328 24.869,27.328 ; 19.66,127.658 20.168,127.658 24.867,127.658 ; 19.914,69.596 19.914,27.328 ; 19.914,85.39 19.914,127.658 ; 20.422,28.852 19.914,27.328 ; 20.422,126.134 19.914,127.658 ; 25.146,21.844 25.146,22.352 25.146,27.051 ; 26.67,21.59 25.146,22.098 ; 26.67,22.606 25.146,22.098 ; 46.459,22.098 25.146,22.098 ; 62.507,22.098 83.82,22.098 ; 82.296,21.59 83.82,22.098 ; 82.296,22.606 83.82,22.098 ; 83.82,21.844 83.82,22.352 83.82,27.051
  text "100.33 (mm)" at 20.828,69.85 h1.52 r90
  text "58.674 (mm)" at 46.713,21.184 h1.52
Drill Drawing:
  circle w0.254: c99.498,44.323 r0.635
  lines w0.254: 98.863,32.258 99.498,32.575 100.133,32.258 99.816,32.893 100.133,33.528 99.498,33.21 98.863,33.528 99.181,32.893 98.863,32.258 ; 98.863,36.068 98.863,36.386 99.181,36.703 98.863,37.02 98.863,37.338 99.181,37.338 99.498,37.02 99.816,37.338 100.133,37.338 100.133,37.02 99.816,36.703 100.133,36.386 100.133,36.068 99.816,36.068 99.498,36.386 99.181,36.068 98.863,36.068 ; 98.863,39.878 100.133,39.878 100.133,41.148 98.863,41.148 98.863,39.878 ; 98.863,47.816 99.181,47.816 99.181,47.498 99.816,47.498 99.816,47.816 100.133,47.816 100.133,48.45 99.816,48.45 99.816,48.768 99.181,48.768 99.181,48.45 98.863,48.45 98.863,47.816 ; 98.863,51.308 100.133,51.308 100.133,52.578 98.863,52.578 98.863,51.308 ; 98.863,56.388 100.133,56.388 99.498,55.118 98.863,56.388 ; 98.863,59.245 99.181,59.245 99.498,58.928 99.816,59.245 100.133,59.245 99.816,59.563 100.133,59.88 99.816,59.88 99.498,60.198 99.181,59.88 98.863,59.88 99.181,59.563 98.863,59.245 ; 99.117,51.562 99.879,51.562 99.879,52.324 99.117,52.324 99.117,51.562
  lines w0.381: 97.133,31.115 195.659,31.115 ; 97.133,61.595 195.659,61.595 ; 111.125,27.305 111.125,65.405 ; 128.849,27.305 128.849,65.405 ; 163.028,27.305 163.028,65.405 ; 175.877,27.305 175.877,65.405 ; 97.133,27.305 195.659,27.305 195.659,65.405 97.133,65.405 97.133,27.305
  text "Symbol" at 99.419,62.738 h1.83
  text "Hit Count" at 112.268,62.738 h1.83
  text "Finished Hole Size" at 129.992,62.738 h1.83
  text "Plated" at 164.171,62.738 h1.83
  text "Hole Type" at 177.02,62.738 h1.83
  text "2" at 112.268,58.928 h1.52
  text "0.900mm (35.43mil)" at 129.992,58.928 h1.52
  text "PTH" at 164.171,58.928 h1.52
  text "Round" at 177.02,58.928 h1.52
  text "4" at 112.268,55.118 h1.52
  text "0.762mm (30.00mil)" at 129.992,55.118 h1.52
  text "PTH" at 164.171,55.118 h1.52
  text "Round" at 177.02,55.118 h1.52
  text "4" at 112.268,51.308 h1.52
  text "1.500mm (59.06mil)" at 129.992,51.308 h1.52
  text "PTH" at 164.171,51.308 h1.52
  text "Round" at 177.02,51.308 h1.52
  text "10" at 112.268,47.498 h1.52
  text "1.100mm (43.31mil)" at 129.992,47.498 h1.52
  text "PTH" at 164.171,47.498 h1.52
  text "Round" at 177.02,47.498 h1.52
  text "19" at 112.268,43.688 h1.52
  text "0.711mm (28.00mil)" at 129.992,43.688 h1.52
  text "PTH" at 164.171,43.688 h1.52
  text "Round" at 177.02,43.688 h1.52
  text "35" at 112.268,39.878 h1.52
  text "0.300mm (11.81mil)" at 129.992,39.878 h1.52
  text "PTH" at 164.171,39.878 h1.52
  text "Round" at 177.02,39.878 h1.52
  text "35" at 112.268,36.068 h1.52
  text "0.600mm (23.62mil)" at 129.992,36.068 h1.52
  text "PTH" at 164.171,36.068 h1.52
  text "Round" at 177.02,36.068 h1.52
  text "43" at 112.268,32.258 h1.52
  text "1.000mm (39.37mil)" at 129.992,32.258 h1.52
  text "PTH" at 164.171,32.258 h1.52
  text "Round" at 177.02,32.258 h1.52
  text "152 Total" at 112.268,28.448 h1.52

## Text inside footprints (layer, text, board x,y; h text height)
BT1: Top Overlay "+" at 34.658,31.565 h1.15 r180
C16: Top Overlay "+" at 33.685,66.143 h1.52 r90